# Altium PCB PCB1.PcbDoc
Units mm, origin at the board's own origin, x right, y up, seen from the top; angles counter-clockwise.
Board outline 100 x 30 mm, 2 copper layers (Top Layer, Bottom Layer); 14 components, 7 nets, 37 pads, 35 vias.
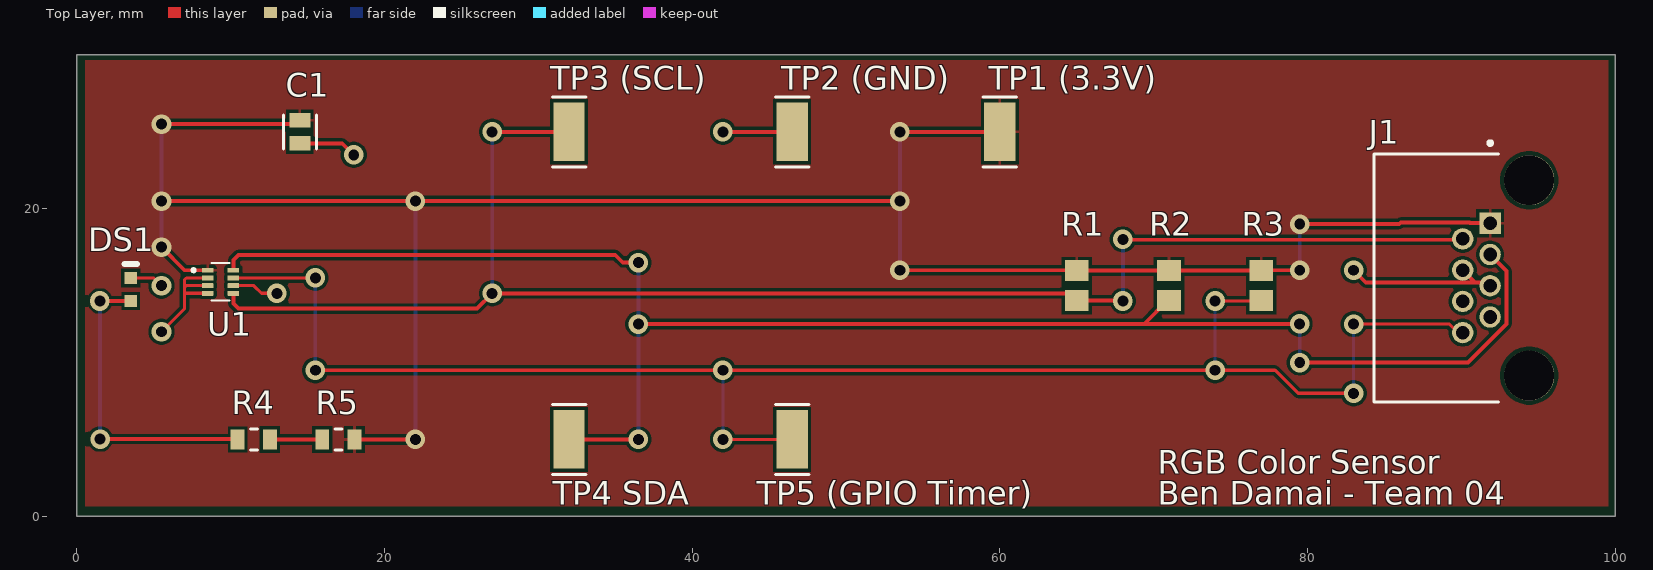
[diagram p0: Top Layer view]
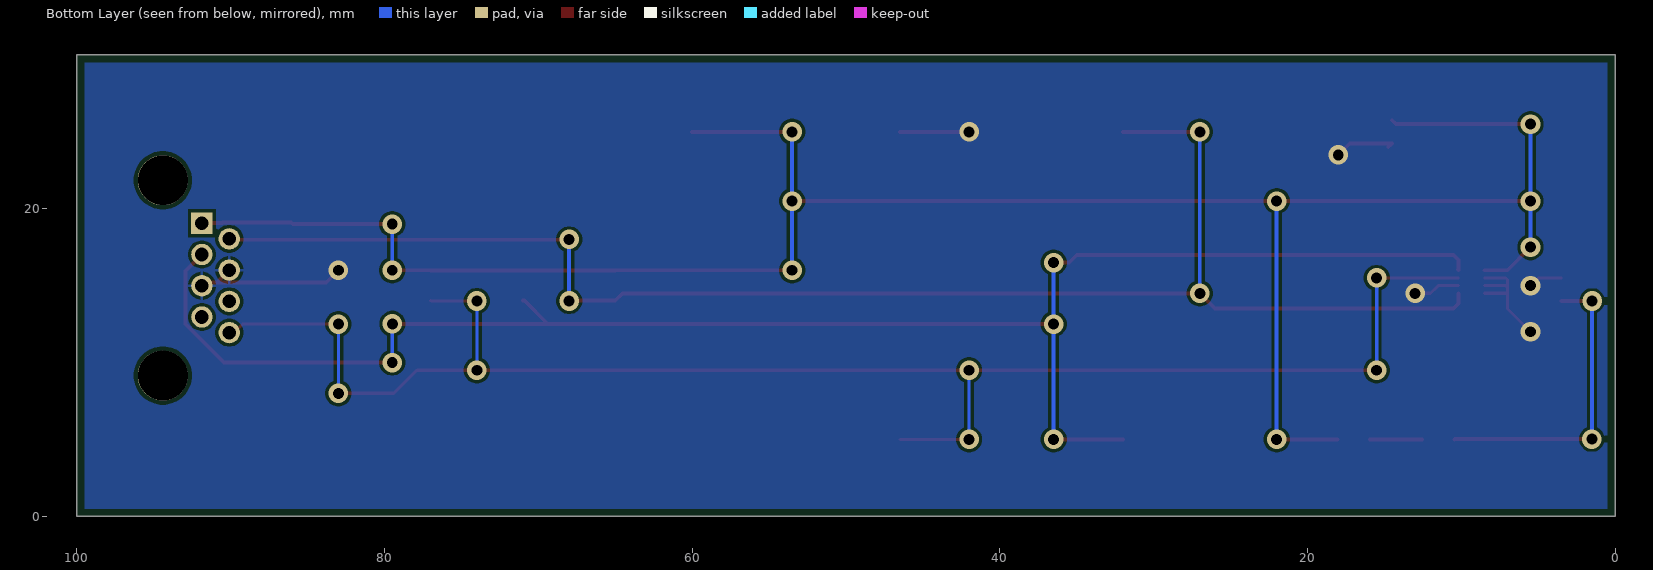
[diagram p1: Bottom Layer view, seen from below]
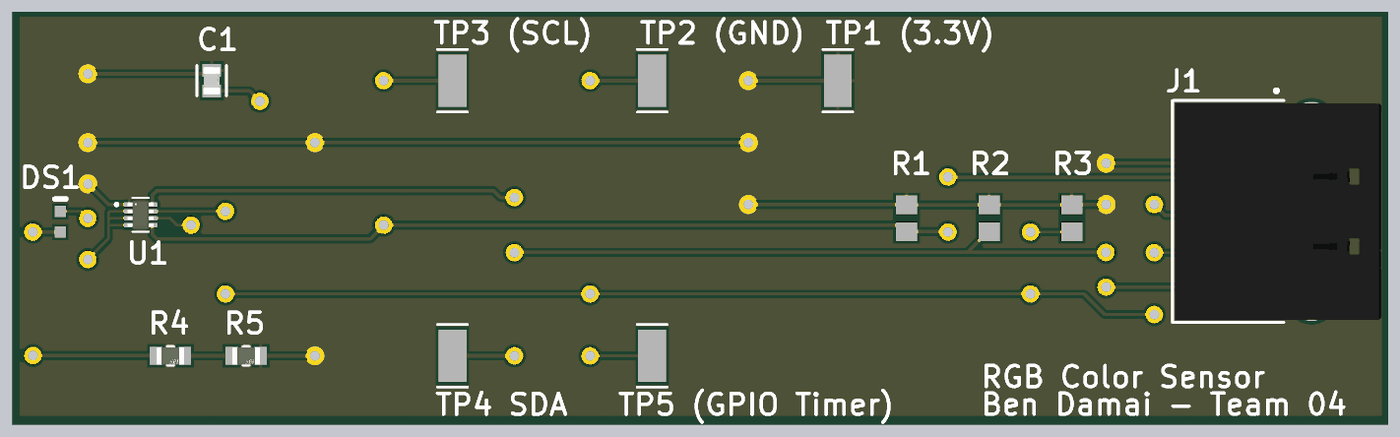
[diagram p2: 3D render of the assembled board from above, using the file's embedded part models]

## Layer stack, top to bottom
Top Solder: solder mask 0.0102, Solder Resist, Dk 3.5
Top Layer: signal copper 0.0356
Dielectric 1: dielectric 0.32, FR-4, Dk 4.8
Bottom Layer: signal copper 0.0356
Bottom Solder: solder mask 0.0102, Solder Resist, Dk 3.5

## Board outline
0,0 0,30 100,30 100,0

## Design rules (kind name [scope] priority, off if disabled: settings)
BoardOutlineClearance [All] p1: gap=0.2 ignorepadtopadclearanceinfootprint=FALSE
Clearance [All] p1: gap=0.203 ignorepadtopadclearanceinfootprint=TRUE except(0.254: Arc-Hole Track-Hole SMDPad-Hole THPad-Hole Via-Hole Fill-Hole Poly-Hole Region-Hole Text-Hole)
ComponentClearance [All] p1: gap=0.127 collisioncheckmode=3 verticalgap=0.127 showdistances=TRUE
DiffPairsRouting [All] p1: maxlimit=0.381 minlimit=0.203 mostfreqgap=0.203 toplayer_minwidth=0.203 toplayer_maxwidth=25.4 toplayer_prefwidth=0.203 bottomlayer_minwidth=0.203 bottomlayer_maxwidth=25.4 bottomlayer_prefwidth=0.203 maxuncoupledlength=12.7
Height [All] p1: minheight=0 maxheight=1816.048 prefheight=12.7
HoleSize [All] p1: absolutevalues=TRUE maxlimit=6.3 minlimit=0.3 maxpercent=80.000 minpercent=20.000
HoleToHoleClearance [All] p1: gap=0.254 allowstackedmicrovias=FALSE
MinimumAnnularRing [All] p1: minimumring=0.152
MinimumSolderMaskSliver [All] p1: minsoldermaskwidth=0.152
PlaneClearance [All] p1: clearance=0.203
PlaneConnect PlaneConnectPowerPads [InPadClass('PowerPads')] p1: planeconnectstyle=Direct reliefexpansion=0.508 reliefentries=4 reliefconductorwidth=0.254 reliefairgap=0.254
PlaneConnect [All] p2: pad.planeconnectstyle=Relief pad.reliefexpansion=0.3 pad.reliefentries=4 pad.reliefconductorwidth=0.203 pad.reliefairgap=0.203 via.planeconnectstyle=Direct via.reliefexpansion=0.3 via.reliefentries=4 via.reliefconductorwidth=0.127 via.reliefairgap=0.127
PolygonConnect PolygonConnectPowerPads [All vs (InPadClass('PowerPads'))] p1: connectstyle=Direct reliefconductorwidth=0.254 reliefentries=4 polygonreliefangle="90 Angle" airgapwidth=0.254
PolygonConnect [All] p2: thpad.connectstyle=Relief thpad.reliefconductorwidth=0.203 thpad.reliefentries=4 thpad.polygonreliefangle="90 Angle" thpad.airgapwidth=0.203 smdpad.connectstyle=Relief smdpad.reliefconductorwidth=0.203 smdpad.reliefentries=4 smdpad.polygonreliefangle="90 Angle" smdpad.airgapwidth=0.203 via.connectstyle=Direct via.reliefconductorwidth=0.127 via.reliefentries=4 via.polygonreliefangle="90 Angle" via.airgapwidth=0.127
RoutingVias [All] p1: holewidth=0.3 width=0.6 viastyle="Through Hole" minholewidth=0.3 minwidth=0.6 maxholewidth=0.6 maxwidth=6.6
SilkToSilkClearance [All] p1: silktosilkclearance=0.127
SilkToSolderMaskClearance [IsPad] p1: minsilkscreentomaskgap=0.127 clearancetoexposedcopper=TRUE
SolderMaskExpansion [All] p1: expansion=0.051 istentingtop=FALSE
UnRoutedNet [All] p1: checkbadconnections=TRUE
Width Power_20mil [All] p1 off: maxlimit=25.4 minlimit=0.508 preferedwidth=0.508 minimp=50.000000 maximp=50.000000 favimp=50.000000
Width Power_12mil [All] p2 off: maxlimit=25.4 minlimit=0.305 preferedwidth=0.305 minimp=50.000000 maximp=50.000000 favimp=50.000000
Width Width_10mil [All] p3 off: maxlimit=25.4 minlimit=0.254 preferedwidth=0.254 minimp=50.000000 maximp=50.000000 favimp=50.000000
Width Width_8mil [All] p4: maxlimit=25.4 minlimit=0.203 preferedwidth=0.203 minimp=50.000000 maximp=50.000000 favimp=50.000000
19 further rules are at their usual default settings.

## Classes and differential pairs
component class 02_Connectors: J1
component class 01_ColorSensorICs: C1 DS1 R1 R2 R3 R4 R5 "TP1 (3.3V)" "TP2 (GND)" "TP3 (SCL)" "TP4 SDA" "TP5 (GPIO Timer)" U1

## Components (designator, comment, footprint, x,y, rotation, side; value= is the part's Value field where it differs from the comment)
C1 "C0805C104K5RACTU" FP-C0805C-DN-MFG 14.5,25 r270 top value="0.10 μF"
DS1 "LTW-C191TS5" LTST-LTW-C191TS5_V 3.5,14.75 r90 top
J1 "RJHSE-5080" FP-RJHSE-5080-MFG 92,15.5 r90 top
R1 "ERJ-6ENF1002V" RESC2013X70X40ML20T20 65,15 r90 top
R2 "ERJ-6ENF1002V" RESC2013X70X40ML20T20 71,15 r90 top
R3 "ERJ-6ENF1002V" RESC2013X70X40ML20T20 77,15 r90 top
R4 "RMCF0805JT4R70" FP-RMCF0805-MFG 11.5,5 r0 top
R5 "RMCF0805JT4R70" FP-RMCF0805-MFG 17,5 r0 top
"TP1 (3.3V)" "TP_5019" FP-5019-MFG 60,25 r90 top
"TP2 (GND)" "TP_5019" FP-5019-MFG 46.5,25 r90 top
"TP3 (SCL)" "TP_5019" FP-5019-MFG 32,25 r90 top
"TP4 SDA" "TP_5019" FP-5019-MFG 32,5 r90 top
"TP5 (GPIO Timer)" "TP_5019" FP-5019-MFG 46.5,5 r90 top
U1 "OPT4048DTSR" SOTFL50P190X60-8N 9.335,15.25 r0 top

## Footprints (in the part's own frame and the unit in brackets; to place one, negate y for a bottom-side part, rotate by r counter-clockwise, add the part's x,y. Pads: shape width x height; smd on the part's side, far side on the other; paste and mask are expansions set on the pad)
FP-5019-MFG [mm]
  rect 3.8x2.03 smd paste+0 mask+0: 1(0,0)
  silkscreen extent -2.27,-1.08 2.27,1.08
FP-C0805C-DN-MFG [mm]
  rect 0.95x1.35 smd paste+0 mask+0: 1(-0.75,0) 2(0.75,0)
  silkscreen extent -1.1,-1.07 1.1,1.07, body extent -1.4,-0.85 1.4,0.85, height 0.25
FP-RJHSE-5080-MFG [mm]
  rect 1.39x1.39 hole 0.89 paste-2539.97 mask+0: 1(3.556,0.127)
  round 1.39 hole 0.89 paste-2539.97 mask+0: 2(2.54,1.905) 3(1.524,0.127) 4(0.508,1.905) 5(-0.508,0.127) 6(-1.524,1.905) 7(-2.54,0.127) 8(-3.556,1.905)
  round 3.25 hole 3.25 unplated paste-2539.97 mask+0: ""(-6.35,-2.413) ""(6.35,-2.413)
  silkscreen extent -8.06,-0.41 8.89,7.68, body extent -8.16,-7.78 8.16,7.78, height 0.25
FP-RMCF0805-MFG [mm]
  rect 0.9x1.3 smd paste+0 mask+0: 1(-1.05,0) 2(1.05,0)
  silkscreen extent -0.23,-0.67 0.23,0.67, body extent -1.6,-0.77 1.6,0.77, height 0.25
LTST-LTW-C191TS5_V [mm] "SMD, 2-Leads, Body 1.6x0.8mm"
  rect 0.8x0.8 smd: 1(-0.75,0) 2(0.75,0)
  silkscreen extent 1.65,-0.4 1.65,0.4, body extent -0.8,-0.4 0.8,0.4, height 0.65
RESC2013X70X40ML20T20 [mm] "Chip Resistor, 2-Leads, Body 2.00x1.25mm, IPC Low Density"
  rect 1.35x1.55 smd: 1(-0.975,0) 2(0.975,0)
  body extent -1.1,-0.72 1.1,0.72, height 0.7
SOTFL50P190X60-8N [mm]
  rrect25% 0.76x0.32 smd mask+0: 1(-0.835,0.75) 2(-0.835,0.25) 3(-0.835,-0.25) 4(-0.835,-0.75) 5(0.835,-0.75) 6(0.835,-0.25) 7(0.835,0.25) 8(0.835,0.75)
  silkscreen extent -1.85,-1.23 0.6,1.23, body extent -0.95,-1.05 0.95,1.05, height 0.6

## Part data
C1: library part CMP-2007-00279-2, "CAP CER 0.1UF 50V X7R 0805", Capacitance="0.10 μF", Manufacturer=KEMET, Package=C0805C-DN, Temperature="-55°C to +125°C", Temperature Characteristic=X7R, Temperature Coefficient=30ppm/°C, Temperature Range High=+125°C, Temperature Range Low=-55°C, Tolerance=0.1, Voltage Rating="50 V", Automotive=No, Category=Cap, ComponentLink2Description=Datasheet, ComponentLink2URL=https://content.kemet.com/datasheets/KEM_C1003_C0G_SMD.pdf, Device Class L1="Passive Components", Device Class L2=Capacitors, Device Class L3="Ceramic Capacitors", Digikey Description="CAP CER 0.1UF 50V X7R 0805", Height=0.88mm, Ipc Land Pattern Name=CAPC200125X78, Lead Free=Yes, Manufacturer Part Number=C0805C104K5RACTU, Material=Ceramic, Mouser Description="Cap Ceramic 0.1uF 50V X7R 10% SMD 2.0 x 1.2 mm 125 C Paper T/R", Octopart=https://octopart.com/c0805c104k5ractu-kemet-143926, RoHS=TRUE
DS1: library part CMP-1674-00013-1, "LED Uni-Color White, 70 mW, 20 mA, -20 to 80 degC, 2-Pin SMD, RoHS, Tape and Reel", Case Code (Imperial)=0603, Case Code (Metric)=1608, Max Operating Temperature="155 degC", Min Operating Temperature="-55 degC", Package Quantity=5000, Power Rating="100 mW", Resistance="12 Ohm", Tolerance=1%, Voltage Rating="50 V", Case\Package=0603, ComponentLink1Description="Manufacturer URL", ComponentLink1URL=http://www.us.liteon.com/, ComponentLink2Description=Datasheet, ComponentLink2URL=http://optoelectronics.liteon.com/upload/download/DS22-2004-201/S_110_LTW-C191TS5.pdf, DatasheetVersion="Rev. B, 06/2010", Height="0.45 mm", Length="1.6 mm", Mount="Surface Mount", PackageDescription="2-Pin Surface Mount Device, Body 1.6 x 0.8 mm", PackageReference=LTW-C191TS5, Packaging="Tape and Reel", Pins=2, REACH SVHC="No SVHC", RoHSCompliant=true, Voltage Rating (DC)="50 V", Width="0.8 mm"
J1: library part CMP-02366-000003-1, "CONN MOD JACK 8P8C R/A UNSHLD", Contact Resistance=20mR, Current Rating=1.5A, Manufacturer=Amphenol, Max Voltage Rating (AC)=125V, Package=CONN_MOD_JACK, Supplier Part Number=RJHSE-5080-ND, Temperature="-55°C to +85°C", Temperature Range High=+85°C, Temperature Range Low=-55°C, Automotive=No, Category=Conn, ComponentLink1Description=https://datasheet.ciiva.com/7629/1682821-7629402.pdf?src-supplier=Element14, ComponentLink1URL=https://datasheet.ciiva.com/7629/1682821-7629402.pdf?src-supplier=Element14, ComponentLink2Description=Datasheet, ComponentLink2URL=https://cdn.amphenol-icc.com/media/wysiwyg/files/documentation/datasheet/inputoutput/io-modjack-rjhse.pdf, ComponentLink3Description=https://datasheet.ciiva.com/1432/1693748-1432448.pdf?src-supplier=Element14, ComponentLink3URL=https://datasheet.ciiva.com/1432/1693748-1432448.pdf?src-supplier=Element14, Conn Gender=Female, Conn Orientation="Right Angle", Connector Type=RJ45, Contact Material=Gold,Nickel, Contact Plating=Gold, Depth=14.99mm, Device Class L1=Connectors, Device Class L2="Modular / Ethernet Connectors", Device Class L3=unset, Digikey Description="CONN MOD JACK 8P8C R/A UNSHLD", Footprint Url=https://cdn.amphenol-icc.com/media/wysiwyg/files/drawing/rjhse5080.pdf?__cf_chl_jschl_tk__=e349db0bbbb6188a39347cd5e541b92fa02c9719-1587748343-0-AW7tChdeHzRPLX9gSWj7WrKaXQoY9BsmT9Ek0h-T62M9y3Rs9iypFcOtkzb-6sGYQEjFE-jcoNciDETCOZrh1rYyOesac5SvYLoLwHIsHvF4AKBlx-MXmfZUVk9OTTJLqyQq2qMm0PFRLJpNcK0nrKResqOniRSYixG2sPTmOPraH-ULJFBDL602CHqcI9KKBgTq90Jh1OL2Td4moJ99rFsJRJ1Tk_uoxGe8ublcP_ARu-uLpWcQrBcwOcHDTAwL29DAwVaqcH7ta8Ks7WMlHmVl_pILeEDwT0bE9vu5Pa5S3PtNRF1leuFkgi_FMbUxTDulc5xzbXSfng8srUIV1lWXny5nx1fZJEUa_w97yKjffzBMxiWLWVN-V7-uqAaPbyv_m-wRyw5O25OZNyJOeGU, Gender=Female, Height=0.535inch, Is Female=yes, Lead Free=Yes, Length=15.75mm, Manufacturer Part Number=RJHSE-5080, Max Current Rating=1.5A, Mounting Technology="Through Hole,Panel", Mouser Description="Modular Connectors / Ethernet Connectors R/A RJ45 NONSHIELDED 8 CONT NO LEDS", Number Of Contacts=8, Number of Ports=1, Number of Positions=8, Number of Positions Loaded=8, Octopart=https://octopart.com/rjhse-5080-amphenol-45060, Orientation="Right Angle", Packaging=Rail/Tube, Pitch=1.02mm, Pricing="1=1.03, 10=0.867, 25=0.832, 50=0.8142, 100=0.7788, 250=0.708, 500=0.6372, 1000=0.56641, 2500=0.51331 (USD)", Radiation Hardening=No, Reach SVHC Compliant=Unknown, RoHS=TRUE, RoHS Compliant=Yes, Stock=72112, Supplier=Digikey, Termination=Solder, Voltage Rating=125V, Voltage Rating (DC)=125V
R1 R2 R3: library part CMP-2001-04376-1, Manufacturer=Panasonic, Part Number=ERJ-6ENF1002V
R4 R5: library part CMP-26527-005191-1, "4.7Ω ±5% 0.125W 0805 Thick Film Chip Resistor AEC-Q200 compliant", Case Code (Imperial)=0805, Case Code (Metric)=2012, Max Operating Temperature=155°C, Max Power Dissipation=125mW, Min Operating Temperature=-55°C, Resistance=4.7R, Resistor Type="Thick Film", Temperature Coefficient=200ppm/°C, Tolerance=5%, Case/Package=0805, Contact Plating=Tin, Features="Automotive AEC-Q200", Height=0.026inch, Lead Free="Lead Free", Length=0.079inch, Mount="Surface Mount", Number of Terminations=2, Packaging="Tape and Reel", Radiation Hardening=No, RoHS Compliant=Yes, Series=RMCF, Width=0.049inch
"TP1 (3.3V)" "TP2 (GND)" "TP3 (SCL)" "TP4 SDA" "TP5 (GPIO Timer)": "Test Point, Mini, SMT, Phos Bronze/Silver, 1000pc Tape & Reel", Manufacturer="Keystone Electronics", Manufacturer Part Number=5019, Package Quantity=1, Supplier Part Number 1=36-5019CT-ND, Body Material=Bronze, Category=Terminals, ComponentLink1Description=https://datasheet.ciiva.com/14848/m60-2p61-14848437.pdf?src-supplier=Digikey, ComponentLink1URL=https://datasheet.ciiva.com/14848/m60-2p61-14848437.pdf?src-supplier=Digikey, ComponentLink2Description=https://datasheet.ciiva.com/14848/m60-2p61-14848438.pdf?src-supplier=Digikey, ComponentLink2URL=https://datasheet.ciiva.com/14848/m60-2p61-14848438.pdf?src-supplier=Digikey, ComponentLink3Description=https://datasheet.ciiva.com/14848/m60-2p61-14848439.pdf?src-supplier=Digikey, ComponentLink3URL=https://datasheet.ciiva.com/14848/m60-2p61-14848439.pdf?src-supplier=Digikey, ComponentLink4Description=https://datasheet.ciiva.com/16885/70182998-16885945.pdf?src-supplier=Allied+Electronics, ComponentLink4URL=https://datasheet.ciiva.com/16885/70182998-16885945.pdf?src-supplier=Allied+Electronics, ComponentLink5Description=https://datasheet.ciiva.com/16318/m60-2p61-16318395.pdf?src-supplier=Future+Electronics, ComponentLink5URL=https://datasheet.ciiva.com/16318/m60-2p61-16318395.pdf?src-supplier=Future+Electronics, Contact Material=Bronze, Contact Plating=Silver, Height=0.09inch, Lead Free="Lead Free", Material=Bronze, Mounting Technology="Surface Mount,PCB", Number Of Contacts=1NUMBER, Packaging="Tape and Reel", Pins=1, Plating=Silver, Pricing="1=0.37, 25=0.2496, 100=0.2117, 250=0.1902, 500=0.1756, 1000=0.16229, 2000=0.15019, 3000=0.14362, 5000=0.13585, 7000=0.13102, 10000=0.12613, 25000=0.1211 (USD)", Reach SVHC Compliant=No, RoHS=Yes, RoHS Compliant=Yes, Series=5019, Stock=282853, Supplier 1=Digikey, Termination=SMD/SMT
U1: "High-speed high-precision tristimulus XYZ color sensor", Package=None, Check_prices=https://www.snapeda.com/parts/OPT4048DTSR/Texas+Instruments/view-part/?ref=eda, MF="Texas Instruments", MP=OPT4048DTSR, SnapEDA_Link=https://www.snapeda.com/parts/OPT4048DTSR/Texas+Instruments/view-part/?ref=snap

## Via types
v1: diameter 1.27, hole 0.711, Top Layer to Bottom Layer, 35 vias

## Nets (pads, with @x,y where several pads share a name; then routed paths per layer and width w, separated by ;. In a path a pad name is that pad's centre, name@x,y a point inside that pad or via, vN(x,y) a via of type N, cw(c..) or ccw(c..) an arc to the next point about the centre after c; other vN are vias at no path point)
3.3V: "TP1 (3.3V).1" C1.1 J1.1 R1.2 R2.2 R3.2 R5.2 U1.1 | length 145.1
  Top Layer w0.254: v1(5.5,17.5) 7,16 U1.1 ; v1(5.5,20.5) v1(22,20.5) v1(53.5,20.5) ; v1(5.5,25.5) 14.25,25.5 C1.1 ; R5.2 v1(22,5) ; v1(53.5,16) 64.975,16 R1.2 R2.2 R3.2 77.025,16 v1(79.5,16) ; v1(53.5,25) 60,25 ; v1(79.5,19) 85.947,19 86.063,19.116 90.541,19.116 90.578,19.078 91.851,19.078 J1.1
  Bottom Layer w0.254: v1(5.5,17.5) v1(5.5,20.5) v1(5.5,25.5) ; v1(22,5) v1(22,20.5) ; v1(53.5,16) v1(53.5,20.5) v1(53.5,25) ; v1(79.5,16) v1(79.5,19)
GND: "TP2 (GND).1" C1.2 DS1.2 J1.4 J1.5 U1.2 U1.3 U1.4 U1.6 | length 32.9
  Top Layer w0.203: DS1.2 5,15.5 v1(5.5,15) ; v1(5.5,12) 7,13.5 7,14.5 ; U1.4 7,14.5 ; U1.3 7.119,15 7,14.881 ; U1.2 7.119,15.5 7,15.381 7,14.881 ; U1.6 11.5,15 12,14.5 v1(13,14.5) ; 7,14.5 7,14.881
  Top Layer w0.254: C1.2@14.75,24 C1.2 17.25,24.25 v1(18,23.5) ; v1(42,25) 46.5,25 ; v1(83,16) 83.791,15.209 90.894,15.209 ; J1.4@90.091,16.004 J1.4 90.894,15.209 ; J1.5 91.656,15.209 90.894,15.209
GPIO: "TP5 (GPIO Timer).1" J1.8 R3.1 U1.7 | length 107.8
  Top Layer w0.203: U1.7 v1(15.5,15.5) ; v1(15.5,9.5) v1(42,9.5) v1(74,9.5) 77.894,9.5 79.394,8 v1(83,8) ; v1(42,5) 46.5,5 ; v1(74,14) 76.975,14 R3.1 ; v1(83,12.5) 89.237,12.5 89.793,11.944 J1.8
  Bottom Layer w0.203: v1(15.5,9.5) v1(15.5,15.5) ; v1(42,5) v1(42,9.5) ; v1(74,9.5) v1(74,14) ; v1(83,8) v1(83,12.5)
NetDS1_1: DS1.1 R4.1 | length 19.9
  Top Layer w0.254: v1(1.5,14) DS1.1 ; v1(1.51,5.024) 10.426,5.024 R4.1
  Bottom Layer w0.254: v1(1.5,14) 1.5,5.014 v1(1.51,5.024)
NetR4_2: R4.2 R5.1 | length 3.4
  Top Layer w0.254: R4.2 R5.1
SCL: "TP3 (SCL).1" J1.2 R1.1 U1.5 | length 100.9
  Top Layer w0.254: U1.5 10.17,13.83 10.5,13.5 26,13.5 v1(27,14.5) 64.525,14.5 R1.1 67.975,14.025 v1(68,14) ; v1(27,25) 32,25 ; v1(68,18) 68.016,17.984 90.039,17.984 J1.2
  Bottom Layer w0.254: v1(27,14.5) v1(27,25) ; v1(68,14) v1(68,18)
SDA: "TP4 SDA.1" J1.3 R2.1 U1.8 | length 110.6
  Top Layer w0.254: U1.8@10.203,16.033 U1.8 10.17,16.67 10.5,17 35,17 35.484,16.516 36.484,16.516 v1(36.5,16.5) ; 32,5 v1(36.5,5) ; v1(36.5,12.5) 36.516,12.516 69.391,12.516 ; R2.1 70.9,14.025 69.391,12.516 ; v1(79.5,10) 90.435,10 92.949,12.514 92.949,15.948 J1.3 ; v1@79.5,12.5 v1(79.484,12.516) 69.391,12.516
  Bottom Layer w0.254: v1(36.5,5) v1(36.5,12.5) v1(36.5,16.5) ; v1(79.484,12.516) 79.5,12.5 v1(79.5,10)
pads on no net: J1. J1.6 J1.7

## Polygon pours and split planes (outlines as drawn)
GND on Bottom Layer "GND_L02_P003" (solid, pour order 3): 0.5,0.5 0.5,29.5 99.5,29.5 99.5,0.5
3.3V on Top Layer "3.3V_L01_P002" (solid, pour order 2): 0.54,0.647 0.54,29.647 99.54,29.647 99.54,0.647

## Silkscreen, mask and mechanical layers (free items; w line width, h text height)
Top Overlay:
  text "RGB Color Sensor" at 70.254,2.754 h1.52
  text "Ben Damai - Team 04" at 70.254,0.754 h1.52